# Altium PCB science_board_pcb_crappy.PcbDoc
Units mm, origin at the board's own origin, x right, y up, seen from the top; angles counter-clockwise.
Board outline 99.7 x 75.68 mm, 2 copper layers (Top Layer, Bottom Layer); 100 components, 55 nets, 310 pads, 78 vias.
Unrouted connection lines stored in the file: 2.
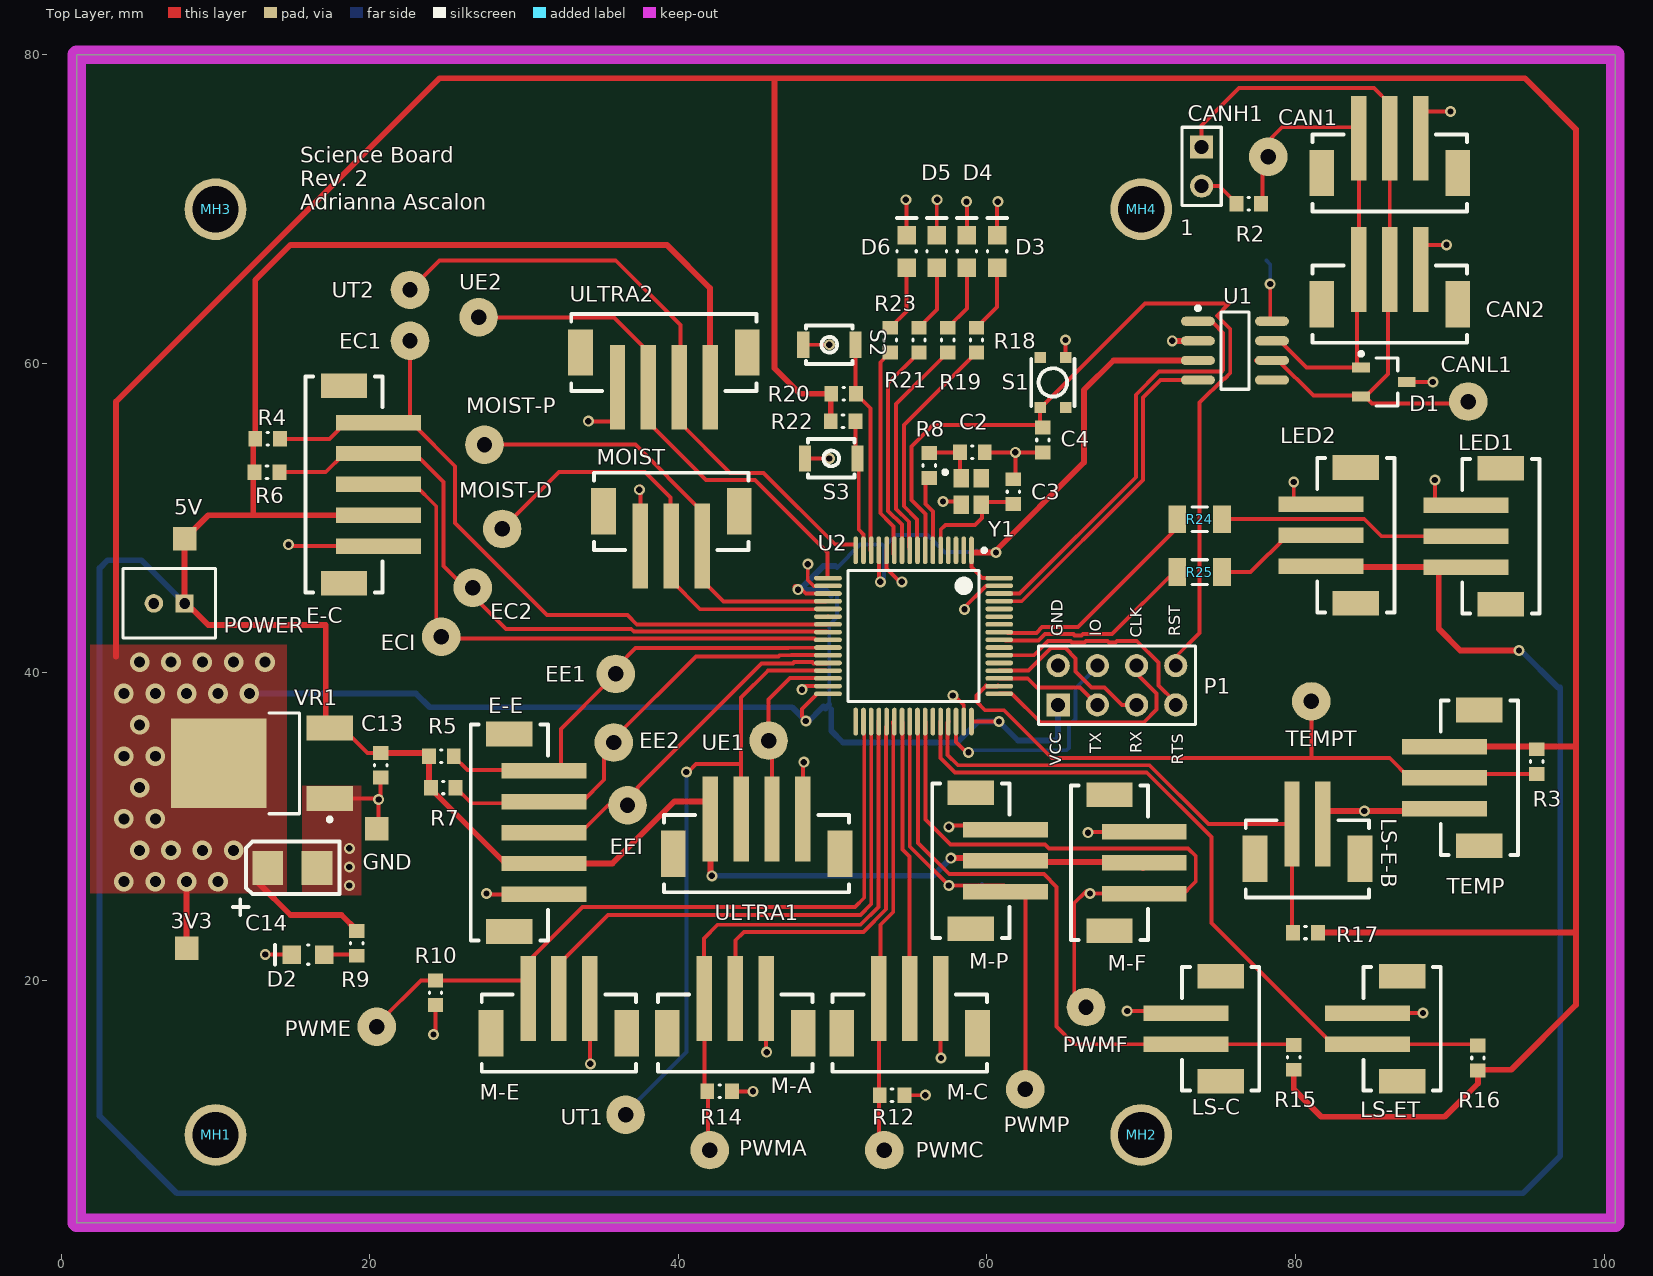
[diagram p0: Top Layer view]
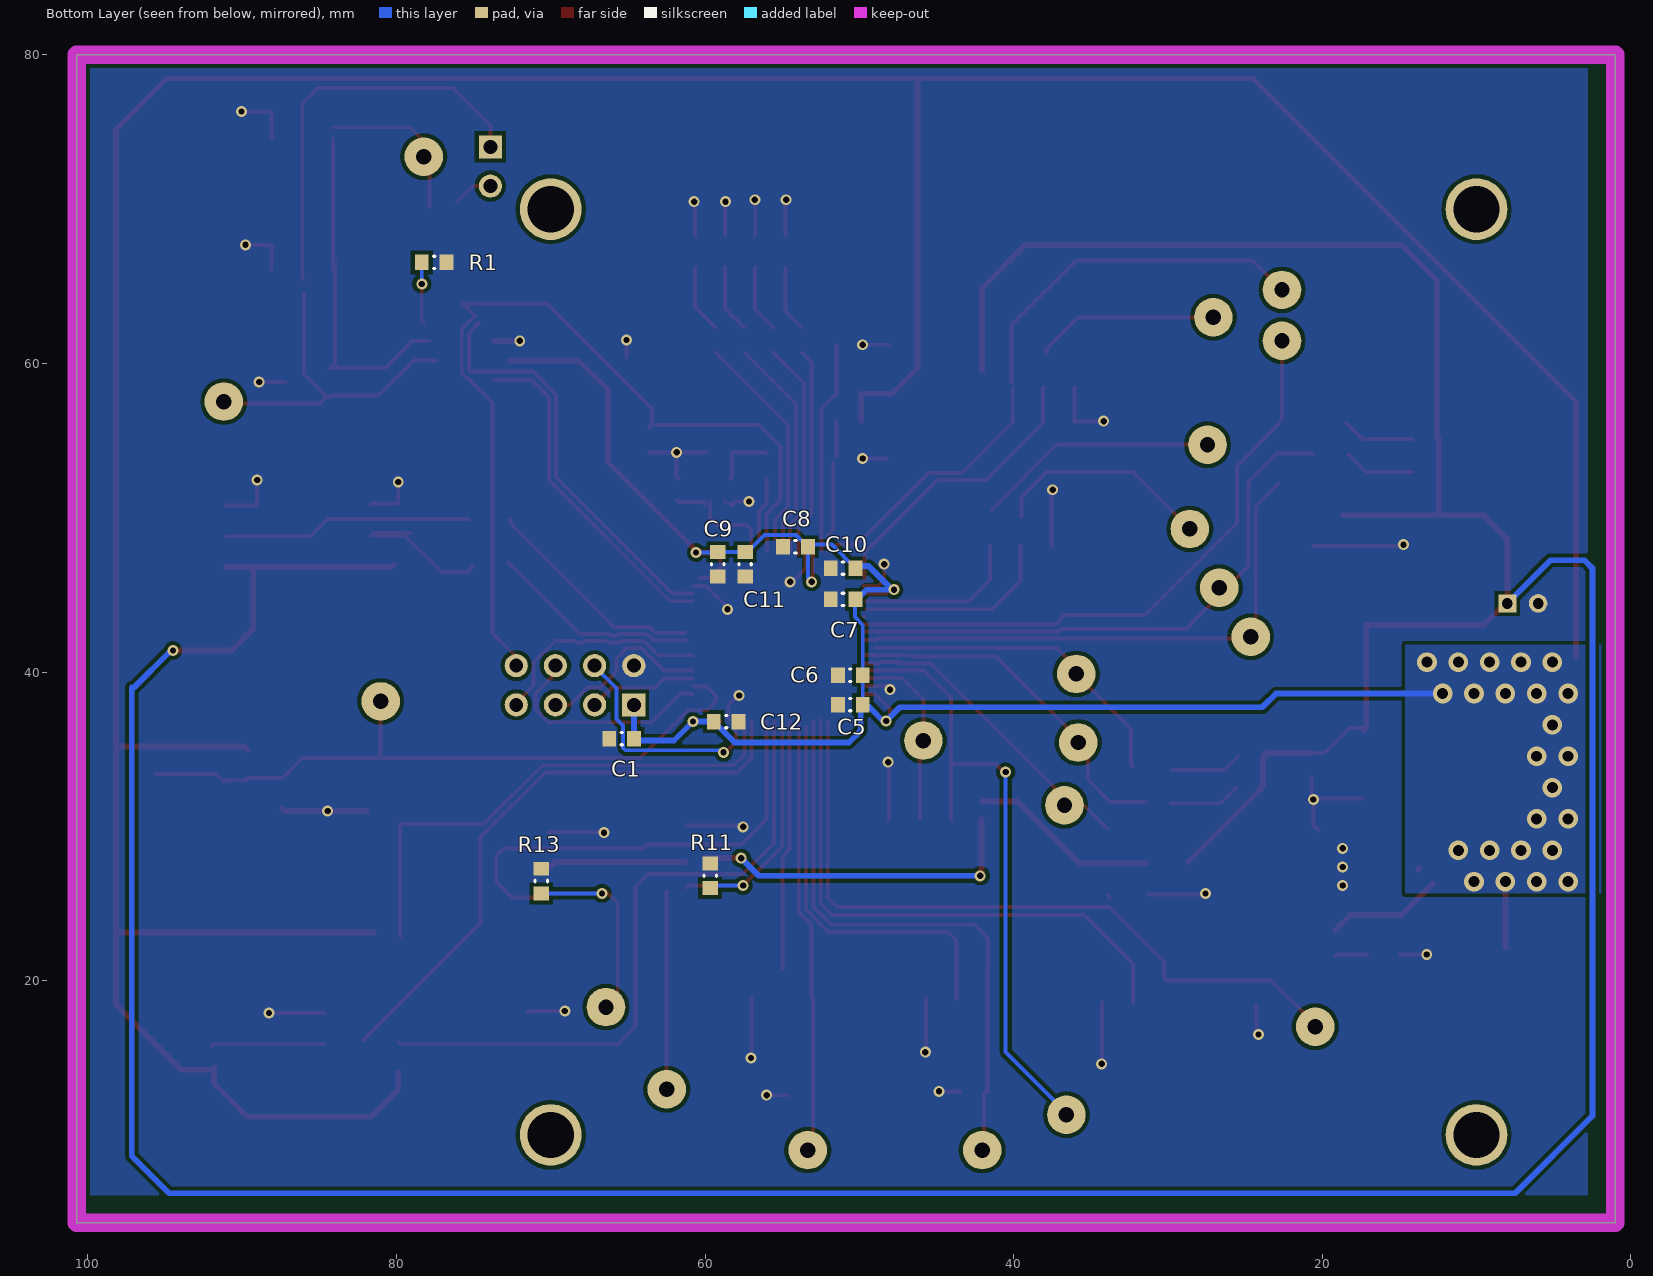
[diagram p1: Bottom Layer view, seen from below]

## Layer stack, top to bottom
Top Solder: solder mask 0.0102, Solder Resist, Dk 3.5
Top Layer: signal copper 0.0356
Dielectric 1: dielectric 0.32, FR-4, Dk 4.8
Bottom Layer: signal copper 0.0356
Bottom Solder: solder mask 0.0102, Solder Resist, Dk 3.5

## Board outline
1.016,4.318 100.711,4.318 100.711,80 1.016,80

## Design rules (kind name [scope] priority, off if disabled: settings)
BoardOutlineClearance [All] p1: gap=0.254 ignorepadtopadclearanceinfootprint=FALSE except(0: Arc-SplitContinuation Track-SplitContinuation SMDPad-SplitContinuation THPad-SplitContinuation Via-SplitContinuation Fill-SplitContinuation Poly-SplitContinuation Region-SplitContinuation Text-SplitContinuation)
Clearance [All] p1: gap=0.254 ignorepadtopadclearanceinfootprint=TRUE except(0: Arc-Hole Track-Hole SMDPad-Hole THPad-Hole Via-Hole Fill-Hole Poly-Hole Region-Hole Text-Hole; 0.127: Arc-SMDPad Track-SMDPad SMDPad-SMDPad; 0.203: Arc-Arc Arc-Track Track-Track)
HoleSize [All] p1: absolutevalues=TRUE maxlimit=3.81 minlimit=0.025 maxpercent=80.000 minpercent=20.000
PolygonConnect [All] p1: connectstyle=Direct reliefconductorwidth=0.254 reliefentries=4 polygonreliefangle="90 Angle" airgapwidth=0.254
RoutingVias [All] p1: holewidth=0.406 width=0.711 viastyle="Through Hole" minholewidth=0.406 minwidth=0.711 maxholewidth=0.711 maxwidth=1.27
SolderMaskExpansion [All] p1: expansion=0.102
Width thicc [(InNet('-5V') OR InNet('+3V3') OR InNet('+5V'))] p1: maxlimit=0.508 minlimit=0.254 preferedwidth=0.381 minimp=50.000000 maximp=50.000000 favimp=50.000000
Width [All] p2: maxlimit=0.508 minlimit=0.203 preferedwidth=0.254 bottomlayer_minwidth=0.254 bottomlayer_maxwidth=0.254 minimp=50.000000 maximp=50.000000 favimp=50.000000
29 further rules are at their usual default settings.

## Classes and differential pairs
component class support: D3 D4 D5 D6 EC1 EC2 ECI EE1 EE2 EEI MH1 MH2 MH3 MH4 MOIST-D MOIST-P PWMA PWMC PWME PWMF PWMP R10 R11 R12 R13 R14 R15 R16 R17 R18 R19 R20 R21 R22 R23 R24 R25 S2 S3 TEMPT UE1 UE2 UT1 UT2
component class power: 3V3 5V C13 C14 D2 GND R9 VR1
component class mcu: C2 C3 C4 C5 C6 C7 C8 C9 C10 C11 C12 R8 S1 U2 Y1
component class connectors: CAN1 CAN2 E-C E-E LED1 LED2 LS-C LS-E-B LS-ET M-A M-C M-E M-F M-P MOIST P1 POWER R3 R4 R5 R6 R7 TEMP ULTRA1 ULTRA2
component class can: 1 C1 CANH1 CANL1 D1 R1 R2 U1

## Components (designator, comment, footprint, x,y, rotation, side; value= is the part's Value field where it differs from the comment)
1 "Header 2" HDR1X2 73.914,74.041 r270 top
3V3 "TESTPOINT_SMD" TESTPOINT 8.128,22.098 r90 top
5V "TESTPOINT_SMD" TESTPOINT 8.001,48.641 r0 top (schematic designator 2)
C1 "CAP_0.1uF_16V_0603" CAPC0603(1608)55_N 65.405,35.687 r180 bottom value=0.1uF
C2 "CAP_15pF_0603" CAPC0603(1608)55_N 59.055,54.24 r180 top locked value=15pF
C3 "CAP_15pF_0603" CAPC0603(1608)55_N 61.715,51.699 r270 top locked value=15pF
C4 "CAP_0.1uF_16V_0603" CAPC0603(1608)55_N 63.627,55.04 r90 top locked value=0.1uF
C5 "CAP_0.1uF_16V_0603" CAPC0603(1608)55_N 50.579,37.895 r0 bottom value=0.1uF
C6 "CAP_0.1uF_16V_0603" CAPC0603(1608)55_N 50.579,39.8 r0 bottom value=0.1uF
C7 "CAP_0.1uF_16V_0603" CAPC0603(1608)55_N 51.054,44.708 r0 bottom value=0.1uF
C8 "CAP_4.7uF_0603" CAPC0603(1608)55_N 54.135,48.116 r180 bottom value=4.7uF
C9 "CAP_0.1uF_16V_0603" CAPC0603(1608)55_N 59.182,46.99 r270 bottom value=0.1uF
C10 "CAP_4.7uF_0603" CAPC0603(1608)55_N 51.054,46.74 r180 bottom value=4.7uF
C11 "CAP_10nF_0603" CAPC0603(1608)55_N 57.404,46.99 r90 bottom value=10nF
C12 "CAP_1uF_16V_0603" CAPC0603(1608)55_N 58.636,36.79 r0 bottom value=1uF
C13 "CAP_0.33uF_16V_0603" CAPC0603(1608)55_N 20.701,33.958 r90 top value=0.33uF
C14 "CAP_10uF_1411_POL" AVX-CAPC3528_V 14.986,27.305 r0 top value=10uF
CAN1 "PH TOP SMD" JST-B3B-SM4-TB 86.106,69.85 r0 top
CAN2 "PH TOP SMD" JST-B3B-SM4-TB 86.106,61.341 r0 top locked
CANH1 "TESTPOINT_LOOP" TESTPOINT_LOOP 78.232,73.406 r0 top
CANL1 "TESTPOINT_LOOP" TESTPOINT_LOOP 91.186,57.531 r90 top
D1 "TVS_DIODE_CAN" TVS_DIODE_CAN 85.725,58.801 r0 top
D2 "DIO_LED_R" LED_0805_LINE 16.002,21.688 r180 top
D3 "DIO_LED_Y" LED_0805_LINE 60.655,67.267 r90 top
D4 "DIO_LED_G" LED_0805_LINE 58.7,67.267 r90 top
D5 "DIO_LED_G" LED_0805_LINE 56.744,67.267 r90 top
D6 "DIO_LED_G" LED_0805_LINE 54.789,67.267 r90 top
E-C "PH TOP SMD" JST-B5B-SM4-TB 15.824,52.165 r270 top
E-E "PH TOP SMD" JST-B5B-SM4-TB 26.543,29.591 r270 top
EC1 "TESTPOINT_LOOP" TESTPOINT_LOOP 22.606,61.468 r180 top
EC2 "TESTPOINT_LOOP" TESTPOINT_LOOP 26.67,45.466 r0 top
ECI "TESTPOINT_LOOP" TESTPOINT_LOOP 24.638,42.291 r0 top
EE1 "TESTPOINT_LOOP" TESTPOINT_LOOP 35.941,39.878 r90 top
EE2 "TESTPOINT_LOOP" TESTPOINT_LOOP 35.814,35.433 r90 top
EEI "TESTPOINT_LOOP" TESTPOINT_LOOP 36.703,31.369 r90 top
GND "TESTPOINT_SMD" TESTPOINT 20.447,29.845 r90 top
LED1 "CON_3M" JST-B3B-SM4-TB 95.809,48.8 r90 top
LED2 "CON_3M" JST-B3B-SM4-TB 86.411,48.863 r90 top
LS-C "PH TOP SMD" JST-B2B-SM4-TB 77.648,16.875 r90 top locked
LS-E-B "PH TOP SMD" JST-B2B-SM4-TB 80.772,25.4 r0 top
LS-ET "PH TOP SMD" JST-B2B-SM4-TB 89.408,16.875 r90 top locked
M-A "PH TOP SMD" JST-B3B-SM4-TB 43.688,14.097 r0 top
M-C "PH TOP SMD" JST-B3B-SM4-TB 54.991,14.097 r0 top
M-E "PH TOP SMD" JST-B3B-SM4-TB 32.258,14.097 r0 top
M-F "PH TOP SMD" JST-B3B-SM4-TB 65.445,27.641 r270 top locked
M-P "PH TOP SMD" JST-B3B-SM4-TB 56.456,27.768 r270 top
MH1 "MOUNTING_HOLES" MOUNTING_HOLE#1 5.715,8 r0 top
MH2 "MOUNTING_HOLES" MOUNTING_HOLE#2 122,5 r0 top
MH3 "MOUNTING_HOLES" MOUNTING_HOLE#3 106,11 r0 top
MH4 "MOUNTING_HOLES" MOUNTING_HOLE#4 111.374,5.612 r0 top
MOIST "PH TOP SMD" JST-B3B-SM4-TB 39.542,52.919 r180 top
MOIST-D "TESTPOINT_LOOP" TESTPOINT_LOOP 28.575,49.276 r90 top
MOIST-P "TESTPOINT_LOOP" TESTPOINT_LOOP 27.432,54.737 r90 top
P1 "HEADER 4X2" HEADER_2X4 64.616,37.876 r0 top locked
POWER "PH TOP TH" JST-B2B-PHSK 7.001,44.45 r180 top
PWMA "TESTPOINT_LOOP" TESTPOINT_LOOP 42.037,9.017 r90 top
PWMC "TESTPOINT_LOOP" TESTPOINT_LOOP 53.34,9.017 r90 top
PWME "TESTPOINT_LOOP" TESTPOINT_LOOP 20.447,17.018 r90 top
PWMF "TESTPOINT_LOOP" TESTPOINT_LOOP 66.421,18.288 r90 top
PWMP "TESTPOINT_LOOP" TESTPOINT_LOOP 62.484,12.954 r90 top
R1 "RES_0R_0603" RESC0603(1608)_N 77.559,66.548 r180 bottom value=0R
R2 "RES_120R_0603" RESC0603(1608)_N 76.962,70.358 r180 top value=120R
R3 "RES_4K7_0603" RESC0603(1608)_N 95.631,34.201 r90 top value=4K7
R4 "RES_10K_0603" RESC0603(1608)_N 13.373,55.118 r180 top value=10K
R5 "RES_10K_0603" RESC0603(1608)_N 24.638,34.544 r180 top value=10K
R6 "RES_10K_0603" RESC0603(1608)_N 13.335,52.959 r180 top value=10K
R7 "RES_10K_0603" RESC0603(1608)_N 24.765,32.512 r180 top value=10K
R8 "RES_0R_0603" RESC0603(1608)_N 56.261,53.389 r90 top value=0R
R9 "RES_100R_0603" RESC0603(1608)_N 19.153,22.413 r90 top value=100R
R10 "RES_10K_0603" RESC0603(1608)_N 24.257,19.215 r90 top value=10K
R11 "RES_10K_0603" RESC0603(1608)_N 59.67,26.797 r270 bottom value=10K
R12 "RES_10K_0603" RESC0603(1608)_N 53.848,12.573 r180 top value=10K
R13 "RES_10K_0603" RESC0603(1608)_N 70.612,26.454 r270 bottom value=10K
R14 "RES_10K_0603" RESC0603(1608)_N 42.672,12.827 r180 top value=10K
R15 "RES_10K_0603" RESC0603(1608)_N 79.883,15.024 r270 top value=10K
R16 "RES_10K_0603" RESC0603(1608)_N 91.821,14.986 r270 top value=10K
R17 "RES_10K_0603" RESC0603(1608)_N 80.645,23.114 r0 top value=10K
R18 "RES_100R_0603" RESC0603(1608)_N 59.321,61.52 r90 top value=100R
R19 "RES_100R_0603" RESC0603(1608)_N 57.458,61.52 r90 top value=100R
R20 "RES_10K_0603" RESC0603(1608)_N 50.711,58.039 r180 top value=10K
R21 "RES_100R_0603" RESC0603(1608)_N 55.596,61.52 r90 top value=100R
R22 "RES_10K_0603" RESC0603(1608)_N 50.673,56.261 r0 top value=10K
R23 "RES_100R_0603" RESC0603(1608)_N 53.733,61.52 r90 top value=100R
R24 "RES_0R_1206" RESC1206(3216)_N 73.787,49.911 r180 top value=0R
R25 "RES_0R_1206" RESC1206(3216)_N 73.787,46.482 r180 top value=0R
S1 "SW_PWR" PTS830GM140 64.271,58.77 r270 top
S2 "SW_TACTILE" B3U-1100P 49.784,61.214 r180 top
S3 "SW_TACTILE" B3U-1100P 49.911,53.848 r180 top
TEMP "PH TOP SMD" JST-B3B-SM4-TB 94.412,33.147 r90 top
TEMPT "TESTPOINT_LOOP" TESTPOINT_LOOP 81.026,38.1 r90 top
U1 "IC TXRX CAN" LT-S8_N 76.073,60.833 r0 top
U2 "STM32F091RC" STM_LQFP64_N 55.245,42.34 r270 top locked
UE1 "TESTPOINT_LOOP" TESTPOINT_LOOP 45.847,35.56 r90 top
UE2 "TESTPOINT_LOOP" TESTPOINT_LOOP 27.051,62.992 r0 top
ULTRA1 "PH TOP SMD" JST-B4B-SM4-TB 45.069,25.73 r0 top
ULTRA2 "PH TOP SMD" JST-B4B-SM4-TB 39.055,63.206 r180 top
UT1 "TESTPOINT_LOOP" TESTPOINT_LOOP 36.576,11.303 r90 top
UT2 "TESTPOINT_LOOP" TESTPOINT_LOOP 22.606,64.77 r0 top
VR1 "5V0_3V3_LDO" VOLTAGE_REGULATOR 14.605,34.085 r90 top
Y1 "CRYSTAL_32MHZ" AVX-CX2520DB32000D0GEJZ1-4_V 58.992,51.699 r0 top locked

## Footprints (in the part's own frame and the unit in brackets; to place one, negate y for a bottom-side part, rotate by r counter-clockwise, add the part's x,y. Pads: shape width x height; smd on the part's side, far side on the other; paste and mask are expansions set on the pad)
AVX-CAPC3528_V [mm] "SMT Capacitor, 2 Leads, Body 3.5x2.8mm"
  rect 2x2.2 smd: 1(-1.6,0) 2(1.6,0)
  silkscreen extent -3.87,-3.05 3.05,1.7, body extent -1.79,-1.54 1.8,1.54, height 1.9
AVX-CX2520DB32000D0GEJZ1-4_V [mm] "Hand Drawn, 4-Leads,Body 2.5x2mm"
  rect 1x1.2 smd: 1(-0.65,0.85) 2(-0.65,-0.85) 3(0.65,-0.85) 4(0.65,0.85)
  silkscreen extent -1.82,1.13 -1.58,1.38, body extent -1,-1.25 1,1.25, height 0.55
B3U-1100P [mm] "TACTILE SWITCH GREY"
  rect 0.8x1.7 smd: 1(-1.7,0) 2(1.7,0)
  silkscreen extent -1.5,-1.25 1.5,1.25
CAPC0603(1608)55_N [mm] "Chip Capacitor, Body 1.6x0.8mm, Height 0.55mm, IPC Medium Density"
  rect 0.9x1 smd: 1(-0.8,0) 2(0.8,0)
  silkscreen extent -0.05,-0.4 0.05,0.4, body extent -0.87,-0.48 0.88,0.47, height 0.55
HDR1X2 [mm] "Connector; Header; 2 Position"
  rect 1.5x1.5 hole 0.9: 1(0,0)
  round 1.5 hole 0.9: 2(2.54,0)
  silkscreen extent -1.27,-1.27 3.81,1.27
HEADER_2X4 [mm]
  rect 1.5x1.5 hole 0.9: 1(0,0)
  round 1.5 hole 0.9: 2(2.54,0) 3(5.08,0) 4(7.62,0) 5(0,2.54) 6(2.54,2.54) 7(5.08,2.54) 8(7.62,2.54)
  silkscreen extent -1.27,-1.27 8.89,3.81
JST-B2B-PHSK [mm]
  rect 1.162x1.162 / inner rect 1.524x1.524 / far side rect 1.162x1.162 hole 0.7: 1(-1,0)
  round 1.2 / inner round 1.524 / far side round 1.2 hole 0.7: 2(1,0)
  silkscreen extent -3,-2.25 3,2.25
JST-B2B-SM4-TB [mm]
  rect 1x5.5 smd: 1(-1,4.75) 2(1,4.75)
  rect 1.6x3 smd: 3(-3.4,2.5) 4(3.4,2.5)
  silkscreen extent -4,0 4,5
JST-B3B-SM4-TB [mm]
  rect 1x5.5 smd: 1(-2,4.75) 2(0,4.75) 3(2,4.75)
  rect 1.6x3 smd: 4(-4.4,2.5) 5(4.4,2.5)
  silkscreen extent -5,0 5,5
JST-B4B-SM4-TB [mm]
  rect 1x5.5 smd: 1(-3,4.75) 2(-1,4.75) 3(1,4.75) 4(3,4.75)
  rect 1.6x3 smd: 5(-5.4,2.5) 6(5.4,2.5)
  silkscreen extent -6,0 6,5
JST-B5B-SM4-TB [mm]
  rect 1x5.5 smd: 1(-4,4.75) 2(-2,4.75) 3(0,4.75) 4(2,4.75) 5(4,4.75)
  rect 1.6x3 smd: 6(-6.4,2.5) 7(6.4,2.5)
  silkscreen extent -7,0 7,5
LED_0805_LINE [mm] "SMD, 2-Leads, Body 2x1.25mm"
  rect 1.2x1.2 smd: 1(-1.05,0) 2(1.05,0)
  silkscreen extent -0.05,-0.63 2.16,0.64, body extent -1,-0.63 1,0.63, height 0.8
LT-S8_N [mm] "SOP, 8-Leads, Body 4.9x3.9mm, Pitch 1.27mm, IPC Medium Density"
  oval 2.2x0.6 smd: 1(-2.4,1.905) 2(-2.4,0.635) 3(-2.4,-0.635) 4(-2.4,-1.905) 5(2.4,-1.905) 6(2.4,-0.635) 7(2.4,0.635) 8(2.4,1.905)
  silkscreen extent -2.52,-2.5 0.9,2.88, body extent -2,-2.5 2,2.5, height 1.76
MOUNTING_HOLE#1 [mm]
  round 4 hole 3 unplated: 0(4.285,2)
MOUNTING_HOLE#2 [mm]
  round 4 hole 3 unplated: 0(-52,5)
MOUNTING_HOLE#3 [mm]
  round 4 hole 3 unplated: 0(-96,59)
MOUNTING_HOLE#4 [mm]
  round 4 hole 3 unplated: 0(-41.374,64.388)
PTS830GM140 [mm] "PWR TACTILE SWITCH (RED)"
  rect 0.7x0.75 smd: 1(-1.625,0.825) 2(1.625,0.825) 3(-1.625,-0.825) 4(1.625,-0.825)
  silkscreen extent -1.53,-1.4 1.52,1.4
RESC0603(1608)_N [mm] "Chip Resistor, Body 1.6x0.8mm, IPC Medium Density"
  rect 0.9x1 smd: 1(-0.8,0) 2(0.8,0)
  silkscreen extent -0.05,-0.4 0.05,0.4, body extent -0.85,-0.47 0.85,0.47, height 0.6
RESC1206(3216)_N [mm] "Chip Resistor, Body 3.2x1.6mm, IPC Medium Density"
  rect 1.15x1.8 smd: 1(-1.45,0) 2(1.45,0)
  silkscreen extent -0.5,-0.8 0.5,0.8, body extent -1.67,-0.87 1.67,0.87, height 0.75
STM_LQFP64_N [mm] "Thin QFP, 64-Leads, Body 10x10mm, Pitch 0.5mm, IPC Medium Density"
  oval 1.8x0.3 smd mask+0.05: 1(-5.55,3.75) 2(-5.55,3.25) 3(-5.55,2.75) 4(-5.55,2.25) 5(-5.55,1.75) 6(-5.55,1.25) 7(-5.55,0.75) 8(-5.55,0.25) 9(-5.55,-0.25) 10(-5.55,-0.75) 11(-5.55,-1.25) 12(-5.55,-1.75) 13(-5.55,-2.25) 14(-5.55,-2.75) 15(-5.55,-3.25) 16(-5.55,-3.75) 33(5.55,-3.75) 34(5.55,-3.25) 35(5.55,-2.75) 36(5.55,-2.25) 37(5.55,-1.75) 38(5.55,-1.25) 39(5.55,-0.75) 40(5.55,-0.25) 41(5.55,0.25) 42(5.55,0.75) 43(5.55,1.25) 44(5.55,1.75) 45(5.55,2.25) 46(5.55,2.75) 47(5.55,3.25) 48(5.55,3.75)
  oval 0.3x1.8 smd mask+0.05: 17(-3.75,-5.55) 18(-3.25,-5.55) 19(-2.75,-5.55) 20(-2.25,-5.55) 21(-1.75,-5.55) 22(-1.25,-5.55) 23(-0.75,-5.55) 24(-0.25,-5.55) 25(0.25,-5.55) 26(0.75,-5.55) 27(1.25,-5.55) 28(1.75,-5.55) 29(2.25,-5.55) 30(2.75,-5.55) 31(3.25,-5.55) 32(3.75,-5.55) 49(3.75,5.55) 50(3.25,5.55) 51(2.75,5.55) 52(2.25,5.55) 53(1.75,5.55) 54(1.25,5.55) 55(0.75,5.55) 56(0.25,5.55) 57(-0.25,5.55) 58(-0.75,5.55) 59(-1.25,5.55) 60(-1.75,5.55) 61(-2.25,5.55) 62(-2.75,5.55) 63(-3.25,5.55) 64(-3.75,5.55)
  silkscreen extent -5.67,-4.25 4.25,4.7, body extent -5,-5 5,5, height 1.6
TESTPOINT [mil]
  rect 60x60 smd: 1(0,0)
TESTPOINT_LOOP [mm]
  round 2.5 hole 1: 1(0,0)
TVS_DIODE_CAN [mm] "SOT23, 3-Leads, Body 2.95x2.80mm, Pitch 0.95mm, IPC Low Density"
  rect 1.15x0.65 smd: 1(-1.475,0.95) 2(-1.475,-0.95) 3(1.475,0)
  silkscreen extent -1.6,-1.55 0.9,1.95, body extent -1.5,-1.55 1.5,1.55, height 1.25
VOLTAGE_REGULATOR [mm] "DPAK, 3-Leads, Body 6.095x6.54mm, Pitch 4.57mm"
  rect 1.6x3 smd: 1(-2.285,-2.79) 3(2.285,-2.79)
  rect 5.8x6.2 smd: 2(0,4.39)
  silkscreen extent -3.76,-2.92 3.27,1.14, body extent -3.27,-0.84 3.27,5.25, height 2.38

## Part data
1: "Header, 2-Pin", LatestRevisionDate=17-Jul-2002, LatestRevisionNote="Re-released for DXP Platform.", Publisher="Altium Limited"
C1 C4 C5 C6 C7 C9: "CAP CER 0.1UF 16V X7R 0603", Digikey Part Number=311-1088-1-ND, Manufacturer=Yageo, MPN=CC0603KRX7R7BB104, Package="0603 (1608 Metric)", Temperature Coefficient=X7R, Voltage Rating=16V, Dimensions="0.063\" L x 0.031\" W (1.60mm x 0.80mm)"
C2 C3: "CAP CER 15PF 250V NPO 0603", Digikey Part Number=311-3282-1-ND, Manufacturer=Yageo, MPN=AC0603JRNPOYBN150, Package="0603 (1608 Metric)", Temperature Coefficient=NP0, Voltage Rating=250v, Dimensions="0.063\" L x 0.031\" W (1.60mm x 0.80mm)"
C8 C10: "CAP CER 4.7UF 6.3V X5R 0603", Digikey Part Number=311-1521-1-ND, Manufacturer=Yageo, MPN=CC0603KRX5R5BB475, Package="0603 (1608 Metric)", Temperature Coefficient=X5R, Voltage Rating=6.3V, Dimensions="0.063\" L x 0.031\" W (1.60mm x 0.80mm)"
C11: "CAP CER 10000PF 16V X7R 0603", Digikey Part Number=311-3369-1-ND, Manufacturer=Yageo, MPN=CC0603KRX7R7BB103, Package="0603 (1608 Metric)", Temperature Coefficient=X7R, Voltage Rating=16V, Dimensions="0.063\" L x 0.031\" W (1.60mm x 0.80mm)"
C12: "CAP CER 1UF 16V Y5V 0603", Digikey Part Number=311-1372-1-ND, Manufacturer=Yageo, MPN=CC0603ZRY5V7BB105, Package="0603 (1608 Metric)", Temperature Coefficient=Y5V, Voltage Rating=16V, Dimensions="0.063\" L x 0.031\" W (1.60mm x 0.80mm)"
C13: "CAP CER 0.33UF 16V X7R 0603", Digikey Part Number=490-6050-1-ND, Manufacturer="Murata Electronics North America", MPN=GCM188R71C334KA37D, Package="0603 (1608 Metric)", Temperature Coefficient=X7R, Voltage Rating=16V, Dimensions="0.063\" L x 0.031\" W (1.60mm x 0.80mm)"
C14: "CAP TANT 10UF 20% 10V 1411", Digikey Part Number=478-12047-1-ND, Manufacturer="AVX Corporation", MPN=F971A106MBAHT3, Package="1411 (3528 Metric)", Voltage Rating=10V, Dimensions="0.063\" L x 0.031\" W (1.60mm x 0.80mm)"
CAN1 CAN2 M-A M-C M-E M-F M-P MOIST TEMP: library part CON_3M_PH_TOP_SMT, "CONN HEADER PH TOP 3POS 2MM SMD", Manufacturer=JST, Part Number=B3B-PH-SM4-TB, ComponentLink1Description=Datasheet, ComponentLink1URL=http://www.jst-mfg.com/product/pdf/eng/ePH.pdf
D1: "TVS DIODE 24V 41V SOT323-3", Digikey Part Number=1727-3891-1-ND, Manufacturer="Nexperia USA Inc.", MPN=PESD2CAN,215, Package="SC-70, SOT-323", ComponentLink1Description=Datasheet, ComponentLink1URL=https://assets.nexperia.com/documents/data-sheet/PESD1CAN-U.pdf
D2: "LED RED DIFFUSED 0805 SMD", Digikey Part Number=475-1278-1-ND, Forward Voltage Drop=2V, Manufacturer=OSRAM, MPN="LS R976-NR-1", Package="0805 (2012 Metric)"
D3: "LED YELLOW DIFFUSED 0805 SMD", Digikey Part Number=475-2560-1-ND, Forward Voltage Drop=2.2V, Manufacturer=OSRAM, MPN="LY R976-PS-36", Package="0805 (2012 Metric)"
D4 D5 D6: "LED GREEN DIFFUSED 0805 SMD", Digikey Part Number=475-1410-1-ND, Forward Voltage Drop=2.2V, Manufacturer=OSRAM, MPN="LG R971-KN-1", Package="0805 (2012 Metric)"
E-C E-E: library part CON_5M_PH_TOP_SMT, "CONN HEADER PH TOP 5POS 2MM SMD", Manufacturer=JST, Part Number=B5B-PH-SM4-TB, ComponentLink1Description=Datasheet, ComponentLink1URL=http://www.jst-mfg.com/product/pdf/eng/ePH.pdf
LS-C LS-E-B LS-ET: library part CON_2M_PH_TOP_SMT, "CONN HEADER PH TOP 2POS 2MM SMD", Manufacturer=JST, Part Number=B2B-PH-SM4-TB, ComponentLink1Description=Datasheet, ComponentLink1URL=http://www.jst-mfg.com/product/pdf/eng/ePH.pdf
MH1 MH2 MH3 MH4: "6cm x 6cm"
P1: "Header, 4-Pin Dual row", Digikey Part Number=S9015E-04-ND, Manufacturer="Sullins Connector Solutions", MPN=GRPB042VWVN-RC
POWER: library part CON_2M_PH_TOP_TH, "CONN HEADER PH TOP 2POS 2MM", Manufacturer=JST, Part Number=B2B-PH-K-S, ComponentLink1Description=Datasheet, ComponentLink1URL=http://www.jst-mfg.com/product/pdf/eng/ePH.pdf
R1 R8: "RES SMD 0 OHM JUMPER 1/10W 0603", Digikey Part Number=311-0.0GRCT-ND, Manufacturer=Yageo, MPN=RC0603JR-070RL, Package="0603 (1608 Metric)", Dimensions="0.063\" L x 0.031\" W (1.60mm x 0.80mm)"
R2: "RES SMD 120 OHM 5% 1/10W 0603", Digikey Part Number=311-120GRCT-ND, Manufacturer=Yageo, MPN=RC0603JR-07120RL, Package="0603 (1608 Metric)", Tolerance=5%, Dimensions="0.063\" L x 0.031\" W (1.60mm x 0.80mm)"
R3: "RES SMD 4.7K OHM 5% 1/10W 0603", Digikey Part Number=311-4.7KGRCT-ND, Manufacturer=Yageo, MPN=RC0603JR-074K7L, Package="0603 (1608 Metric)", Tolerance=5%, Dimensions="0.063\" L x 0.031\" W (1.60mm x 0.80mm)"
R4 R5 R6 R7 R10 R11 R12 R13 R14 R15 R16 R17 R20 R22: "RES SMD 10K OHM 5% 1/10W 0603", Digikey Part Number=311-10KGRCT-ND, Manufacturer=Yageo, MPN=RC0603JR-0710KL, Package="0603 (1608 Metric)", Tolerance=5%, Dimensions="0.063\" L x 0.031\" W (1.60mm x 0.80mm)"
R9 R18 R19 R21 R23: "RES SMD 100 OHM 1% 1/10W 0603", Digikey Part Number=311-100HRCT-ND, Manufacturer=Yageo, MPN=RC0603FR-07100RL, Package="0603 (1608 Metric)", Tolerance=1%, Dimensions="0.063\" L x 0.031\" W (1.60mm x 0.80mm)"
R24 R25: "RES SMD 0 OHM JUMPER 1/10W 1206", Digikey Part Number=311-0.0GRCT-ND, Manufacturer=Yageo, MPN=RC0603JR-070RL, Package="0603 (1608 Metric)", Dimensions="0.063\" L x 0.031\" W (1.60mm x 0.80mm)"
S1: "Power Switch (Red)", Digikey Part Number=CKN10587CT-ND, Manufacturer=C&K, MPN="PTS830GM140 SMTR LFS", ComponentLink1Description=Datasheet, ComponentLink1URL=https://www.ckswitches.com/media/1478/pts830.pdf
S2 S3: "Tactile Switch (Grey)", Digikey Part Number=SW1021TR-ND, Manufacturer="Omron Electronics Inc-EMC Div", MPN=B3U-1100P
U1: library part LTC2875, "IC TXRX CAN 4MBPS 8SO", Digikey Part Number=LTC2875IS8#PBF-ND, Manufacturer="Linear Technologies", MPN=LTC2875IS8#PBF, Package="8-SOIC (0.154\", 3.90mm Width)", ComponentLink1Description=Datasheet, ComponentLink1URL=https://www.analog.com/media/en/technical-documentation/data-sheets/2875f.pdf
U2: Digikey Part Number=497-15167-ND, Manufacturer=STMicroelectronics, Package=64-LQFP, ComponentLink1Description=Datasheet, ComponentLink1URL=https://www.st.com/content/ccc/resource/technical/document/datasheet/95/3c/2e/5b/21/09/45/a6/DM00115237.pdf/files/DM00115237.pdf/jcr:content/translations/en.DM00115237.pdf#%5B%7B%22num%22%3A96%2C%22gen%22%3A0%7D%2C%7B%22name%22%3A%22XYZ%22%7D%2C67%2C755%2Cnull%5D, MPN=STM32F091RC
ULTRA1 ULTRA2: library part CON_4M_PH_TOP_SMT, "CONN HEADER PH TOP 4POS 2MM SMD", Manufacturer=JST, Part Number=B4B-PH-SM4-TB, ComponentLink1Description=Datasheet, ComponentLink1URL=http://www.jst-mfg.com/product/pdf/eng/ePH.pdf
VR1: "IC REG LINEAR 3.3V 1A DPAK", Current Output=1A, Digikey Part Number=NCP1117DT33T5GOSCT-ND, Manufacturer="ON Semiconductor", MPN=NCP1117DT33T5G
Y1: "CRYSTAL 32MHZ 8PF SMD", Digikey Part Number=1253-1730-1-ND, Manufacturer="Kyocera International Inc. Electronic Components", MPN=CX2520DB32000D0GPSC1, Package="4-SMD, No Lead", Dimensions="0.098\" L x 0.079\" W (2.50mm x 2.00mm)"

## Via types
v1: diameter 0.711, hole 0.406, Top Layer to Bottom Layer, 54 vias
v2: diameter 1.27, hole 0.711, Top Layer to Bottom Layer, tented both sides, 24 vias

## Nets (pads, with @x,y where several pads share a name; then routed paths per layer and width w, separated by ;. In a path a pad name is that pad's centre, name@x,y a point inside that pad or via, vN(x,y) a via of type N, cw(c..) or ccw(c..) an arc to the next point about the centre after c; other vN are vias at no path point)
+3V3: 3V3.1 C1.2 C5.1 C6.1 C7.1 C8.2 C9.1 C10.2 C11.2 C12.2 C14.1 P1.1 R3.2 R9.2 R15.2 R16.2 R17.2 R20.2 R22.1 TEMP.3 U1.3 U2.1 U2.13 U2.19 U2.32 U2.48 U2.64 VR1.2 | length 381.7
  Top Layer w0.254: v1(47.752,45.339) 47.879,45.466 48.255,45.09 U2.19 ; 48.006,37.133 48.006,37.61 48.986,38.59 U2.32 ; U2.13 52.995,45.938 v1(53.086,45.847) ; U2.48 v1(60.786,36.79) ; U2.1@58.995,47.752 58.995,46.803 59.697,46.101 U2.64@60.325,46.101
  Top Layer w0.381: 3.556,41.021 3.556,57.531 24.511,78.486 46.228,78.486 ; 3V3.1 8.128,26.162 v2@8.255,26.289 ; C14.1@12.827,26.289 14.859,24.257 18.161,24.257 R9.2@19.177,23.241 ; C14.1@13.716,27.305 C14.1@13.809,27.212 ; v1@47.587,45.504 v1(47.752,45.339) ; R22.1 49.873,58.001 R20.2 47.879,58.039 46.228,59.69 46.228,78.486 ; U2.1@58.995,47.752 60.452,47.752 66.294,53.594 66.294,58.293 68.199,60.198 U1.3@72.644,60.198 ; R15.2@79.883,14.097 79.883,12.954 81.661,11.176 89.662,11.176 91.821,13.335 R16.2@91.821,14.224 ; R17.2 98.044,23.114 ; TEMP.3@89.662,34.988 89.853,35.179 98.044,35.179 ; R16.2@91.821,14.351 R16.2@91.821,14.224 ; 46.228,78.486 94.869,78.486 98.171,75.184 98.171,38.862 98.171,18.415 93.98,14.224 R16.2@91.821,14.224
  Bottom Layer w0.254: C5.1 C6.1@49.779,39.746 ; C6.1 49.779,43.048 50.292,43.561 C7.1@50.292,44.958 ; C10.2@50.271,46.757 51.774,48.26 C8.2@53.213,48.26 ; v1(53.086,45.847) 53.335,46.096 C8.2 54.115,48.895 56.134,48.895 57.277,47.752 C11.2@57.404,47.752 ; C11.2 C9.1 59.22,47.79 C9.1@59.309,47.879 ; C9.1@59.309,47.752 v1(60.579,47.752) ; P1.1@64.605,37.865 P1.1
  Bottom Layer w0.381: v2(12.192,38.608) 22.987,38.608 23.876,37.719 47.371,37.719 v1(48.26,36.83) ; v1(47.752,45.339) v1@47.868,45.339 ; v1@48.26,36.703 48.333,36.703 49.398,37.768 49.525,37.641 C5.1 ; C5.1@49.911,37.592 49.911,36.195 50.673,35.433 58.079,35.433 C12.2 v1(60.786,36.79) 62.016,35.56 C1.2@64.516,35.56 ; C7.1@49.911,44.958 49.53,45.339 v1@47.868,45.339 ; C10.2@50.165,46.863 49.392,46.863 v1@47.868,45.339 ; C1.2 P1.1@64.605,37.865
  other v2: 4.064,26.416 6.096,26.416 8.128,26.416 10.16,26.416 5.08,28.448 7.112,28.448 9.144,28.448 11.176,28.448 4.064,30.48 6.096,30.48 5.08,32.512 4.064,34.544 6.096,34.544 5.08,36.576 4.064,38.608 6.096,38.608 8.128,38.608 10.16,38.608 5.08,40.64 7.112,40.64 9.144,40.64 11.176,40.64 13.208,40.64
+5V: 5V.1 C13.2 E-C.4 E-E.4 LED1.1 LED2.1 M-F.2 M-P.2 POWER.1 R4.2 R5.2 R6.2 R7.2 ULTRA1.1 ULTRA2.1 VR1.3 | length 338.6
  Top Layer w0.254: VR1.3 18.237,36.37 19.849,34.758 C13.2
  Top Layer w0.381: POWER.1@8.001,44.323 POWER.1 ; R4.2@12.446,55.118 12.446,50.165 ; R4.2 12.573,65.405 14.859,67.691 39.243,67.691 42.037,64.897 ULTRA2.1@42.037,59.563 ; VR1.3@17.272,36.195 17.145,36.322 17.145,43.053 9.525,43.053 8.128,44.45 POWER.1 ; E-C.4@18.669,50.165 12.446,50.165 ; C13.2 R5.2@23.582,34.758 ; R5.2@23.711,34.544 R5.2@23.711,34.798 ; R5.2 23.838,32.677 R7.2@24.003,32.512 ; R7.2 23.965,32.423 E-E.4@28.702,27.686 ; E-E.4@31.42,27.591 35.719,27.591 39.751,31.623 ULTRA1.1@42.037,31.623 ; ULTRA1.1 42.069,26.892 v1(42.164,26.797) ; v1(57.658,27.94) M-P.2@59.944,27.94 ; M-P.2@61.288,27.686 69.723,27.686 M-F.2@70.104,27.305 ; LED2.1@80.137,46.99 80.327,46.8 LED1.1@89.281,46.8 ; LED1.1@89.281,46.863 LED1.1@89.281,46.8 ; LED1.1 LED1.1@89.281,46.8 ; v1(94.488,41.402) 90.678,41.402 89.281,42.799 LED1.1@89.281,46.8 ; POWER.1 5V.1 9.525,50.165 12.446,50.165
  Bottom Layer w0.381: POWER.1 5.207,47.244 2.996,47.244 2.488,46.736 2.488,11.228 7.493,6.223 94.742,6.223 97.155,8.636 97.155,38.989 97.028,38.989 94.615,41.402 v1(94.488,41.402) ; v1(42.164,26.797) 56.515,26.797 v1(57.658,27.94)
CAN_H: CAN1.1 CAN2.1 CANH1.1 D1.1 R2.1 U1.7 | length 35.1
  Top Layer w0.254: U1.7@77.851,61.468 78.994,61.468 80.711,59.751 D1.1 ; R2.1@77.851,70.18 77.851,73.279 78.242,73.348 CANH1.1@78.93,73.469 ; CANH1.1@77.978,74.168 79.121,75.311 CAN1.1@84.074,75.311 ; CANH1.1@78.105,72.644 CANH1.1@78.93,73.469 ; CANH1.1@78.584,73.788 CANH1.1@78.93,73.469 ; CAN2.1@83.979,66.599 83.979,60.039 D1.1@84.328,59.69 ; CAN2.1 CAN1.1
CAN_L: 1.1 CAN1.2 CAN2.2 CANL1.1 D1.2 U1.6 | length 48
  Top Layer w0.254: 1.1@73.914,74.676 73.914,75.438 76.327,77.851 85.09,77.851 86.106,76.835 CAN1.2 CAN2.2 86.106,65.532 CAN2.2@85.979,65.405 ; U1.6@77.444,60.198 78.867,60.198 81.153,57.912 84.201,57.912 D1.2@84.262,57.851 ; D1.2@84.328,57.785 D1.2@84.262,57.851 ; CAN2.2@85.979,64.516 85.979,59.309 D1.2@84.521,57.851 ; CANL1.1@91.059,57.531 90.932,57.404 84.968,57.404 D1.2@84.521,57.851 ; D1.2@84.262,57.851 D1.2@84.521,57.851
GND: C1.1 C2.1 C3.1 C4.1 C5.2 C6.2 C7.2 C8.1 C9.2 C10.1 C11.1 C12.1 C13.1 C14.2 CAN1.3 CAN2.3 D1.3 D2.2 D3.2 D4.2 D5.2 D6.2 E-C.5 E-E.5 GND.1 LED1.3 LED2.3 LS-C.2 LS-E-B.2 LS-ET.2 M-A.3 M-C.3 M-E.3 M-F.1 M-P.1 MOIST.3 P1.5 POWER.2 R1.2 R10.1 R11.1 R12.1 R13.1 R14.1 S1.1 S2.2 S3.2 TEMP.1 U1.2 U2.12 U2.18 U2.31 U2.47 U2.63 ULTRA1.4 ULTRA2.4 VR1.1 Y1.2 | length 114.2
  Top Layer w0.254: v1(13.223,21.688) D2.2 ; v1@15.018,48.165 E-C.5 ; VR1.1 20.522,31.8 v1(20.574,31.748) ; GND.1@20.193,29.718 20.574,30.099 v1(20.574,31.748) ; C13.1 20.701,31.875 v1(20.574,31.748) ; v1@24.13,16.383 24.257,16.51 R10.1 ; v1(27.559,25.654) 27.559,25.527 27.623,25.591 E-E.5 ; E-E.5@33.782,25.4 E-E.5@33.894,25.512 ; v1(34.163,56.261) 34.176,56.248 36.055,56.248 ULTRA2.4 ; M-E.3@34.258,18.593 34.258,14.764 34.29,14.732 v1(34.29,14.605) ; v1(37.465,51.816) 37.465,51.943 37.542,52.02 MOIST.3 ; R14.1 v1(44.831,12.827) ; M-A.3 45.688,15.399 v1(45.72,15.367) ; ULTRA1.4 48.069,34.099 v1(48.133,34.163) ; v1@48.074,38.989 48.006,38.921 v1(48.006,38.862) 48.234,39.09 U2.31 U2.31@49.652,39.047 ; S2.2 v1(49.784,61.214) ; S3.2 v1(49.784,53.848) ; v1@48.387,46.863 48.387,45.974 48.771,45.59 U2.18 ; U2.12 53.495,46.708 v1@54.229,45.974 ; R12.1 v1(56.007,12.573) ; v1(54.737,70.612) 54.789,70.56 D6.2 ; v1@56.642,70.612 56.744,70.51 D5.2 ; M-C.3 56.991,15.208 56.896,15.113 v1(57.023,14.986) ; v1(57.15,51.054) 58.039,51.054 58.293,50.8 Y1.2@58.42,50.927 ; v1(57.785,38.481) 57.879,38.481 58.495,37.865 U2.47 ; v1@57.836,30.029 57.856,30.049 M-P.1@61.206,30.049 ; v1@58.42,44.069 59.941,45.59 U2.63 ; v1@58.547,70.612 v1(58.674,70.485) 58.7,70.459 D4.2 ; Y1.2@58.673,50.976 Y1.2@58.72,51.022 ; C2.1 v1(61.841,54.24) ; D3.2 60.655,70.434 v1(60.706,70.485) ; C3.1 61.841,52.625 v1(61.841,54.24) ; C4.1 v1(61.841,54.24) ; S1.1 65.096,61.385 v1@65.1,61.39 ; v1(66.548,29.591) 66.598,29.641 M-F.1 ; v1(69.088,18.034) 71.374,18.034 LS-C.2@71.501,17.907 ; v1(79.883,52.324) 79.883,50.927 81.597,50.927 LED2.3 ; LS-ET.2@84.658,17.891 88.376,17.891 v1@88.36,17.907 ; D1.3 v1(88.9,58.801) ; CAN2.3 88.106,67.659 88.138,67.691 v1(89.789,67.691) ; CAN1.3 88.106,76.295 88.138,76.327 v1(90.043,76.327) ; v1(89.027,52.451) 89.027,50.8 LED1.3
  Top Layer w0.381: v1@72.263,61.468 U1.2 ; LS-E-B.2@81.915,30.988 v1(84.455,30.988) 87.249,30.988 TEMP.1@87.376,31.115
  other v1: 24.13,16.51 88.265,17.907 18.669,26.162 18.669,27.368 18.669,28.575 57.531,29.972 58.547,44.069 54.483,45.847 48.387,46.99 14.732,48.26 72.009,61.468 65.084,61.517 56.769,70.612
Net1_2: 1.2 R2.2 | length 2.6
  Top Layer w0.254: 1.2 75.057,71.501 R2.2@76.073,70.485
NetC2_2: C2.2 R8.2 Y1.1 | length 4
  Top Layer w0.254: R8.2@56.007,54.151 56.096,54.24 C2.2 58.255,52.636 Y1.1
NetC3_2: C3.2 U2.5 Y1.3 | length 7.4
  Top Layer w0.254: U2.5@57.003,47.89 57.003,49.227 57.304,49.528 59.218,49.528 59.67,49.98 Y1.3@59.67,51.015 ; Y1.3@60.02,50.835 60.02,51.022 61.715,51.022 C3.2@61.815,51.122
NetD2_1: D2.1 R9.1 | length 2.1
  Top Layer w0.254: D2.1 19.078,21.688 R9.1
NetD3_1: D3.1 R18.2 | length 4.5
  Top Layer w0.254: R18.2 60.655,63.654 D3.1
NetD4_1: D4.1 R19.2 | length 4.4
  Top Layer w0.254: R19.2 58.7,63.561 D4.1
NetD5_1: D5.1 R21.2 | length 4.4
  Top Layer w0.254: R21.2 56.769,63.493 56.769,66.193 D5.1
NetD6_1: D6.1 R23.2 | length 4.3
  Top Layer w0.254: R23.2 54.789,63.376 D6.1
NetE-C_1: E-C.1 EC1.1 R4.1 U2.23 | length 44.4
  Top Layer w0.254: R4.1 17.399,55.118 E-C.1@18.415,56.134 ; EC1.1 22.606,56.388 E-C.1@22.733,56.261 ; E-C.1@22.86,56.007 25.527,53.34 25.527,49.657 31.496,43.688 36.703,43.688 37.301,43.09 U2.23 U2.23@49.822,43.09
NetE-C_2: E-C.2 EC2.1 R6.1 U2.24 | length 41.8
  Top Layer w0.254: R6.1 17.145,52.959 E-C.2@18.288,54.102 ; E-C.2 E-C.2@22.924,54.165 ; E-C.2@22.86,54.229 E-C.2@22.924,54.165 ; U2.24 49.652,42.632 37.112,42.632 36.945,42.799 28.829,42.799 24.765,46.863 24.765,52.324 E-C.2@22.924,54.165
NetE-C_3: E-C.3 ECI.1 U2.25 | length 35.8
  Top Layer w0.254: E-C.3@22.86,52.197 24.308,50.749 24.308,42.748 ECI.1@24.701,42.355 ; ECI.1 24.754,42.175 31.358,42.175 ; 31.369,42.164 31.358,42.175 ; U2.25 48.893,42.09 48.818,42.164 39.944,42.164 39.933,42.175 31.358,42.175
NetE-E_1: E-E.1 EE1.1 R5.1 U2.26 | length 24.9
  Top Layer w0.254: R5.1 26.327,33.655 E-E.1@29.718,33.655 ; E-E.1@32.258,33.909 E-E.1@32.385,34.036 ; E-E.1@32.385,33.909 E-E.1@32.385,34.036 ; EE1.1@35.433,39.37 32.385,36.322 E-E.1@32.385,34.036 ; EE1.1@36.068,40.386 37.229,41.547 47.117,41.547 ; 47.117,41.578 U2.26@48.967,41.578
NetE-E_2: E-E.2 EE2.1 R7.1 U2.27 | length 27.7
  Top Layer w0.254: R7.1 26.581,31.496 E-E.2@29.845,31.496 ; E-E.2@31.42,31.591 33.75,31.591 35.179,33.02 35.179,34.798 EE2.1 ; EE2.1@35.941,35.814 41.148,41.021 46.482,41.021 46.551,41.09 47.306,41.09 47.314,41.097 49.687,41.097 U2.27
NetE-E_3: E-E.3 EEI.1 U2.28 | length 21.4
  Top Layer w0.254: E-E.3@33.909,29.845 35.433,31.369 EEI.1 EEI.1@37.338,31.369 ; EEI.1@37.338,31.242 EEI.1@37.338,31.369 ; EEI.1@37.592,31.369 EEI.1@37.338,31.369 ; U2.28 49.669,40.564 48.766,40.564 48.69,40.64 47.503,40.64 47.427,40.564 45.39,40.564 37.338,32.512 EEI.1@37.338,31.369
NetLED1_2: LED1.2 R24.1 R24.2 U2.57 | length 30.7
  Top Layer w0.254: U2.57@61.341,42.545 63.206,42.545 63.579,42.919 65.906,42.919 72.617,49.631 R24.2@72.644,49.911 ; R24.1@75.311,49.911 84.455,49.911 85.566,48.8 LED1.2
NetLED2_2: LED2.2 R25.1 R25.2 U2.56 | length 24
  Top Layer w0.254: U2.56@61.214,42.037 63.344,42.037 63.769,42.462 65.6,42.462 65.682,42.379 66.129,42.379 66.212,42.462 68.116,42.462 72.236,46.583 R25.2@72.733,47.079 ; R25.1@75.057,46.863 75.438,46.482 77.089,46.482 79.47,48.863 LED2.2 81.502,49.022 LED2.2@79.121,49.022
NetLS-C_1: LS-C.1 R15.1 U2.41 | length 43
  Top Layer w0.254: U2.41 55.538,36.747 55.538,28.917 57.556,26.899 63.685,26.899 64.516,26.067 64.516,17.018 65.659,15.875 LS-C.1 79.756,15.875 R15.1@79.883,16.002
NetLS-E-B_1: LS-E-B.1 R17.1 U2.45 | length 33.7
  Top Layer w0.254: U2.45 57.452,36.747 57.452,34.623 58.115,33.96 70.547,33.96 74.357,30.15 LS-E-B.1 79.772,22.876 R17.1@79.756,22.86
NetLS-ET_1: LS-ET.1 R16.1 U2.44 | length 45.7
  Top Layer w0.254: U2.44 56.995,34.433 57.926,33.503 70.358,33.503 74.549,29.312 74.549,23.749 LS-ET.1@82.169,16.129 ; LS-ET.1 91.821,15.875 R16.1@91.948,15.748
NetM-A_1: M-A.1 PWMA.1 R14.2 U2.36 | length 38
  Top Layer w0.254: R14.2@41.688,12.827 M-A.1 41.688,20.733 41.656,20.765 41.656,22.733 42.545,23.622 51.816,23.622 52.959,24.765 U2.36@52.959,36.83 ; R14.2@41.783,12.827 41.91,12.7 PWMA.1@41.91,9.017
NetM-A_2: M-A.2 U2.37 | length 26.2
  Top Layer w0.254: M-A.2 43.688,22.606 44.247,23.165 52.005,23.165 53.467,24.626 U2.37@53.467,36.449
NetM-C_1: M-C.1 PWMC.1 R12.2 U2.38 | length 29.3
  Top Layer w0.254: PWMC.1@53.34,8.128 52.991,8.477 M-C.1 53.086,18.942 53.086,23.599 53.924,24.437 53.924,36.638 53.899,36.664 53.899,36.754 U2.38@53.975,36.83
NetM-C_2: M-C.2 U2.39 | length 16.2
  Top Layer w0.254: U2.39 54.538,36.747 54.538,28.506 54.991,28.053 M-C.2@54.991,20.828
NetM-E_1: M-E.1 PWME.1 R10.2 U2.34 | length 46.7
  Top Layer w0.254: PWME.1@20.701,17.399 23.317,20.015 R10.2 30.048,20.015 M-E.1@30.226,20.193 ; M-E.1@30.258,20.193 30.258,21.241 33.782,24.765 51.435,24.765 52.045,25.375 52.045,36.74 U2.34
NetM-E_2: M-E.2 U2.35 | length 36.2
  Top Layer w0.254: M-E.2@32.258,18.593 M-E.2 32.258,21.082 35.433,24.257 51.804,24.257 52.502,24.954 U2.35@52.502,36.779 ; U2.35@52.502,36.83 U2.35@52.502,36.906
NetM-F_3: M-F.3 PWMF.1 R13.2 U2.42 | length 45.8
  Top Layer w0.254: U2.42 56.007,36.778 56.007,30.454 57.632,28.829 63.754,28.829 64.008,28.575 73.025,28.575 73.533,28.067 73.533,26.416 72.504,25.387 M-F.3@70.195,25.387 ; PWMF.1 65.659,19.05 65.659,25.019 v1@66.421,25.781 ; v1(66.675,25.654) 66.688,25.641 M-F.3
  Bottom Layer w0.254: v1@66.802,25.527 66.929,25.654 R13.2
NetM-P_3: M-P.3 PWMP.1 R11.2 U2.40 | length 30.5
  Top Layer w0.254: U2.40 54.995,28.696 57.529,26.162 v1(57.531,26.162) 61.093,26.162 M-P.3@61.206,26.049 ; PWMP.1 M-P.3@62.484,25.781
  Bottom Layer w0.254: v1(57.531,26.162) 59.343,26.162 59.457,26.049 R11.2@59.67,26.262
NetMOIST_1: MOIST-P.1 MOIST.1 U2.20 | length 26.5
  Top Layer w0.254: MOIST-P.1 37.211,54.737 MOIST.1@41.402,50.546 ; MOIST.1 41.542,45.961 42.926,44.577 U2.20@49.53,44.577
NetMOIST_2: MOIST-D.1 MOIST.2 U2.21 | length 27.4
  Top Layer w0.254: MOIST-D.1 32.258,52.959 37.846,52.959 39.497,51.308 MOIST.2@39.497,50.038 ; MOIST.2 39.542,45.929 41.402,44.069 U2.21@49.53,44.069
NetP1_2: P1.2 U2.51 | length 7.5
  Top Layer w0.254: U2.51 62.645,39.59 63.228,39.007 66.025,39.007 P1.2
  Bottom Layer w0.254: P1.2@67.156,37.492 P1.2
NetP1_3: P1.3 U2.52 | length 11.5
  Top Layer w0.254: U2.52 62.69,40.09 64.148,41.547 65.085,41.547 65.747,40.885 65.747,40.029 66.769,39.007 67.625,39.007 68.756,37.876 P1.3
NetP1_4: P1.4 U2.54 | length 15.1
  Top Layer w0.254: U2.54 63.043,41.09 63.958,42.004 65.41,42.004 65.493,41.922 66.319,41.922 66.401,42.004 67.81,42.004 67.892,41.922 68.339,41.922 68.422,42.004 69.707,42.004 71.105,40.607 71.105,39.142 P1.4@72.136,38.112 ; P1.4@72.136,37.719 P1.4@72.136,38.112 ; P1.4@72.136,38.227 P1.4@72.136,38.112 ; P1.4 72.236,38.011 P1.4@72.136,38.112
NetP1_6: P1.6 U2.46 | length 14.6
  Top Layer w0.254: U2.46 57.995,35.477 v1@58.547,34.925
  Bottom Layer w0.254: v1(58.801,34.798) 58.936,34.933 65.16,34.933 65.309,35.082 65.309,36.53 65.747,36.968 65.747,38.95 P1.6@67.056,40.259
NetP1_7: P1.7 U2.49 | length 14.7
  Top Layer w0.254: U2.49 60.813,38.608 61.595,38.608 63.458,36.745 70.165,36.745 70.993,37.574 70.993,38.608 69.696,39.905 P1.7
NetR1_1: R1.1 U1.8 | length 4.2
  Top Layer w0.254: U1.8@78.232,62.611 78.359,62.738 v1(78.359,65.151)
  Bottom Layer w0.254: R1.1@78.105,66.675 78.359,66.421 v1(78.359,65.151)
NetR3_1: R3.1 TEMP.2 TEMPT.1 U2.50 | length 44.5
  Top Layer w0.254: U2.50@59.944,39.116 59.893,39.065 ; U2.50@60.706,39.116 60.655,39.065 59.893,39.065 ; TEMPT.1 81.026,34.544 80.899,34.417 ; TEMP.2@89.662,32.988 TEMP.2@91.281,32.988 ; TEMP.2 87.376,33.147 86.106,34.417 80.899,34.417 ; TEMP.2@91.186,32.893 TEMP.2@91.281,32.988 ; R3.1 91.694,33.401 TEMP.2@91.281,32.988 ; 59.893,39.065 59.309,38.481 59.309,38.1 59.883,37.526 61.091,37.526 64.2,34.417 70.737,34.417 80.899,34.417
NetR8_1: R8.1 U2.6 | length 4
  Top Layer w0.254: R8.1@56.007,52.551 56.007,50.901 56.495,50.413 56.495,48.842 U2.6@56.495,48.746
NetR18_1: R18.1 U2.8 | length 14.4
  Top Layer w0.254: U2.8@55.474,48.641 55.474,49.882 54.61,50.746 54.61,56.009 R18.1
NetR19_1: R19.1 U2.9 | length 14.5
  Top Layer w0.254: U2.9@54.991,48.006 54.94,48.057 54.94,49.743 54.102,50.581 54.102,57.363 R19.1
NetR20_1: R20.1 S2.1 U2.14 | length 13.9
  Top Layer w0.254: S2.1 51.484,57.99 R20.1@51.562,57.912 ; R20.1 52.452,57.098 U2.14@52.452,48.261 ; U2.14@52.451,48.26 U2.14@52.452,48.261 ; U2.14@52.452,47.879 U2.14@52.452,48.261
NetR21_1: R21.1 U2.10 | length 14
  Top Layer w0.254: U2.10@54.483,47.879 54.483,49.553 53.594,50.442 53.594,58.718 R21.1
NetR22_2: R22.2 S3.1 U2.15 | length 8.2
  Top Layer w0.254: R22.2 51.473,54.064 S3.1@51.562,53.975 ; S3.1@51.689,53.594 51.689,49.227 51.994,48.922 51.994,47.891 U2.15
NetR23_1: R23.1 U2.11 | length 13.7
  Top Layer w0.254: R23.1 53.086,60.073 53.086,50.304 53.452,49.937 53.452,49.926 53.952,49.426 53.952,47.648 U2.11@53.975,47.625
NetU1_1: U1.1 U2.62 | length 27
  Top Layer w0.254: U2.62 62.108,45.09 69.647,52.629 69.647,57.974 71.154,59.482 75.23,59.482 75.311,59.563 75.311,61.976 U1.1@74.676,62.611
NetU1_4: U1.4 U2.61 | length 21.9
  Top Layer w0.254: U2.61 62.254,44.59 70.104,52.439 70.104,57.785 71.247,58.928 U1.4
NetU2_16: U2.16 ULTRA2.2 UT2.1 | length 40.7
  Top Layer w0.254: UT2.1 24.511,66.675 35.941,66.675 40.132,62.484 ULTRA2.2@40.132,58.801 ; ULTRA2.2 40.055,56.211 43.358,52.908 45.517,52.908 50.165,48.26 U2.16@51.435,48.26
NetU2_17: U2.17 UE2.1 ULTRA2.3 | length 31.1
  Top Layer w0.254: UE2.1 35.814,62.992 ULTRA2.3@37.846,60.96 ; ULTRA2.3@37.846,60.706 ULTRA2.3@37.846,60.96 ; ULTRA2.3@37.973,60.833 ULTRA2.3@37.846,60.96 ; ULTRA2.3 38.1,58.411 38.1,56.134 41.783,52.451 44.958,52.451 49.657,47.752 U2.17@49.657,46.101
NetU2_29: U2.29 ULTRA1.2 UT1.1 | length 41.6
  Top Layer w0.254: v1(40.513,33.528) 40.64,33.528 41.148,34.036 44.069,34.036 ; ULTRA1.2 44.069,34.036 ; U2.29@49.53,40.107 45.822,40.107 44.069,38.354 44.069,34.036
  Bottom Layer w0.254: UT1.1@36.576,11.43 40.513,15.367 v1(40.513,33.528)
NetU2_30: U2.30 UE1.1 ULTRA1.3 | length 12.1
  Top Layer w0.254: UE1.1 45.847,38.227 47.244,39.624 U2.30@49.784,39.624 ; ULTRA1.3 46.069,35.401 UE1.1@46.101,35.433
R\S\T\: C4.2 P1.8 S1.4 U2.7 | length 58.1
  Top Layer w0.254: U2.7 55.995,48.695 56.007,48.707 56.007,50.255 55.118,51.144 55.118,54.61 56.515,56.007 C4.2@63.46,56.007 ; S1.4 63.446,56.021 C4.2@63.46,56.007 ; S1.4@63.5,57.15 70.231,63.881 75.692,63.881 74.903,63.092 75.768,62.226 75.768,59.374 75.419,59.025 75.353,59.025 73.787,57.459 73.787,42.545 72.236,40.994 P1.8 ; C4.2 C4.2@63.46,56.007
  Bottom Layer w0.254: P1.8@72.166,40.416 P1.8
pads on no net: CAN1.4 CAN1.5 CAN2.4 CAN2.5 E-C.6 E-C.7 E-E.6 E-E.7 LED1.4 LED1.5 LED2.4 LED2.5 LS-C.3 LS-C.4 LS-E-B.3 LS-E-B.4 LS-ET.3 LS-ET.4 M-A.4 M-A.5 M-C.4 M-C.5 M-E.4 M-E.5 M-F.4 M-F.5 M-P.4 M-P.5 MH1.0 MH2.0 MH3.0 MH4.0 MOIST.4 MOIST.5 S1.2 S1.3 TEMP.4 TEMP.5 U1.5 U2.2 U2.3 U2.4 U2.22 U2.33 U2.43 U2.53 U2.55 U2.58 U2.59 U2.60 ULTRA1.5 ULTRA1.6 ULTRA2.5 ULTRA2.6 Y1.4
copper on no net: | length 0
  Top Layer w0.254: 49.679,43.574 49.695,43.59

## Polygon pours and split planes (outlines as drawn)
GND on Bottom Layer "GND pour" (solid, pour order 24): 2.794,80 2.794,6.096 101.854,6.096 101.854,80 48.514,80
+3V3 on Bottom Layer "GND-+3V3" (solid, pour order 22): 1.905,41.783 1.905,25.654 14.605,25.654 14.605,41.783
GND on Top Layer "Top Layer-GND" (solid, pour order 28): 15.621,32.639 19.431,32.639 19.431,25.527 15.621,25.527
+3V3 on Top Layer "3V3 top" (solid, pour order 20): 14.628,41.783 14.628,25.654 0.023,25.654 0.023,41.783

## Keep-outs
Keep-Out Layer:
  lines w1.2: 100.711,4.572 100.711,80 ; 1.016,4.318 1.016,80 ; 1.016,4.318 100.711,4.318 100.711,80 ; 1.016,4.318 1.016,80 ; 1.016,80 100.711,80 ; 1.016,80 100.711,80

## Other copper
Top Layer:
  pour cut-out: 41.722,40.423
Bottom Layer:
  pour cut-out: 10.351,40.531
  pour cut-out: 5.524,41.152

## Silkscreen, mask and mechanical layers (free items; w line width, h text height)
Top Overlay:
  text "Science Board  / Rev. 2 / Adrianna Ascalon" at 15.494,69.977 h1.02

## Text inside footprints (layer, text, board x,y; h text height)
P1: Top Overlay "TX" at 67.416,34.724 h0.76 r90; Top Overlay "RX" at 70.016,34.724 h0.76 r90; Top Overlay "RTS" at 72.716,33.997 h0.76 r90; Top Overlay "IO" at 67.416,42.322 h0.76 r90; Top Overlay "CLK" at 70.016,42.222 h0.76 r90; Top Overlay "RST" at 72.536,42.322 h0.76 r90; Top Overlay "VCC" at 64.816,33.922 h0.76 r90; Top Overlay "GND" at 64.916,42.322 h0.76 r90